# EAGLE board Shibobi_PowerMeasure (EAGLE 9.1.0)
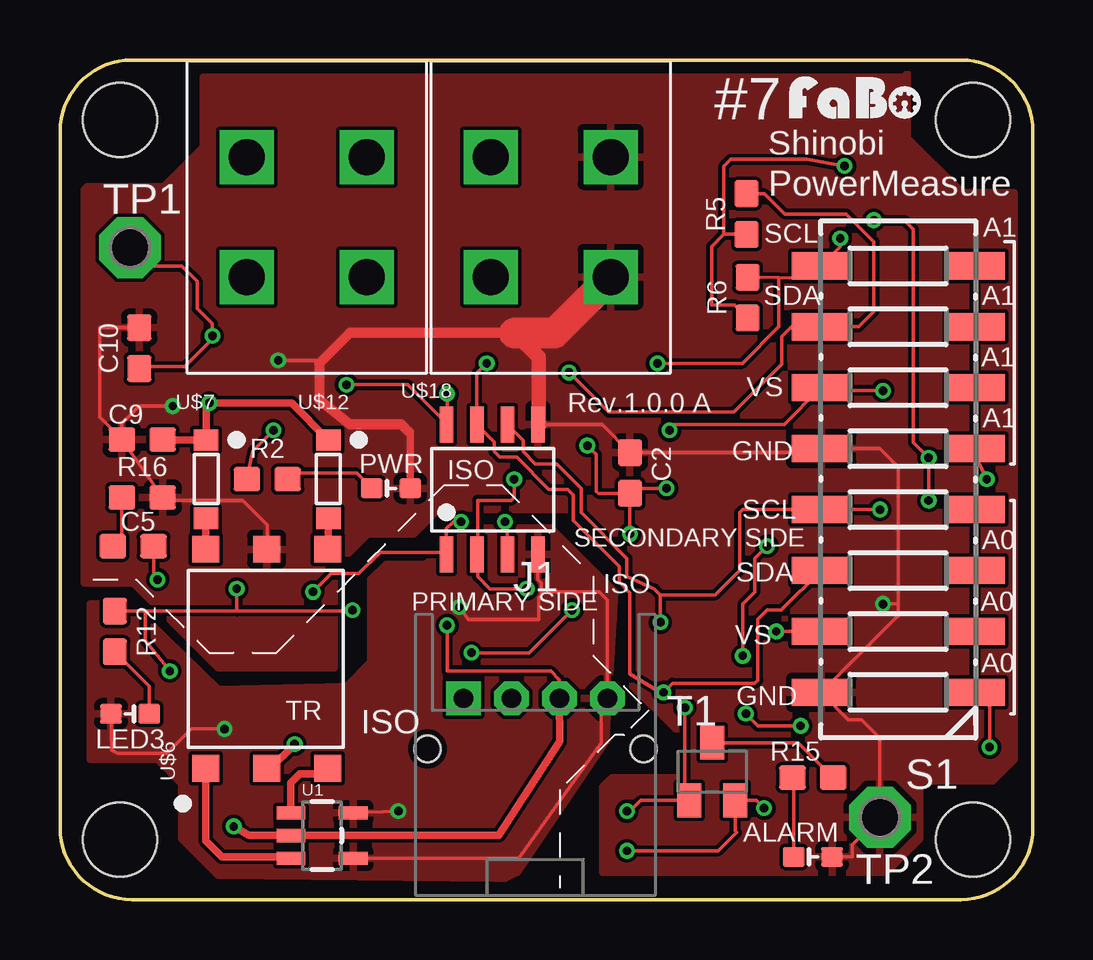
[diagram p0: board, top side]
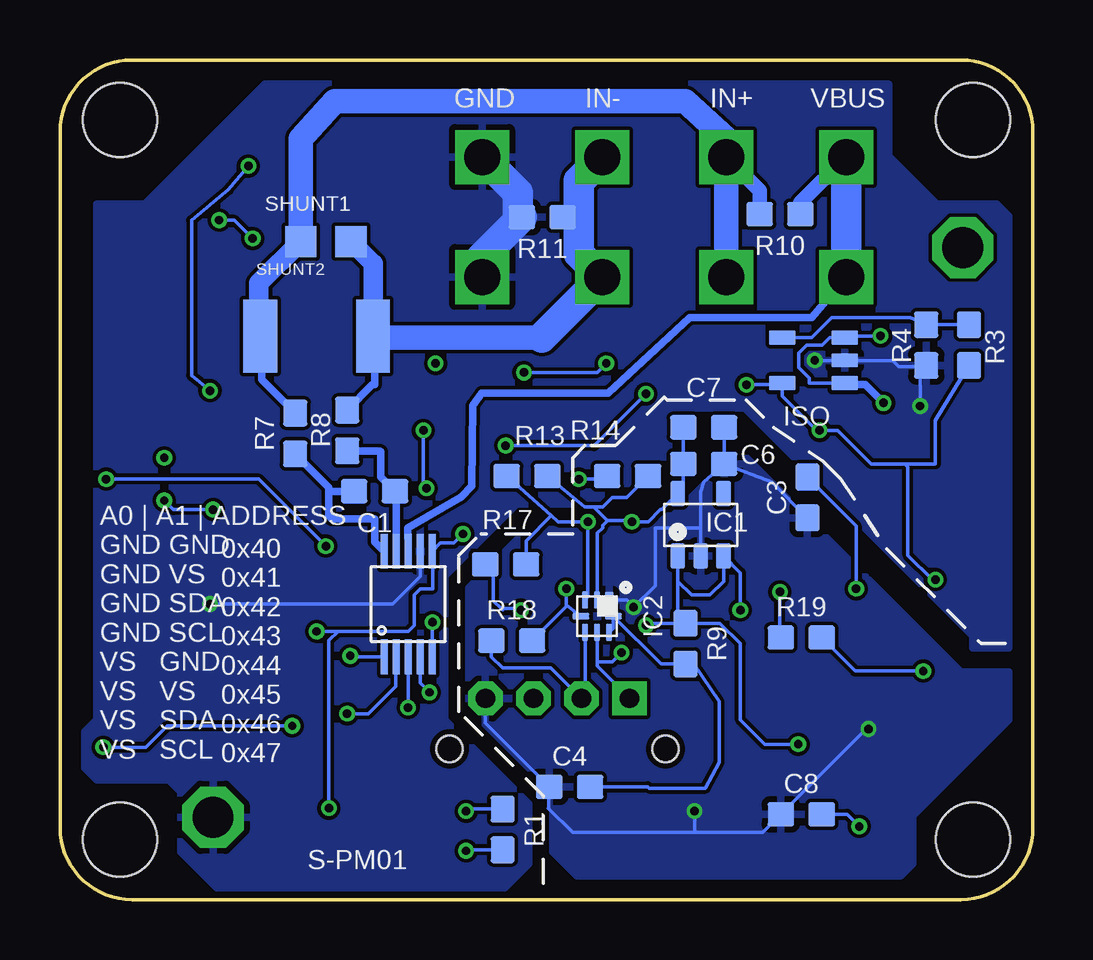
[diagram p1: board, bottom side, seen from below]

Size 40.54 x 35 mm. Coordinates in mm from the lower left corner, seen from the top.
Copper layers (1*16): Top 0.035mm / dielectric 1.5mm / Bottom 0.035mm
Design rules "SeeedStudio_2layer_DRU_no_angle_20140221": minimum track width 6mil, minimum drill 12mil, track to track 6mil, track to pad 6mil, pad to pad 6mil, via to via 6mil, smd to smd 0mil, copper to edge 10mil, drill to drill 10mil, minimum pad ring 10mil, minimum via ring 6mil, stop-mask expansion 2mil, vias tented up to drill 100mil, thermal gap 10mil

## Footprints (pad centres in the part's own frame; a part is rotated, then mirrored left to right if it is on the bottom)
0603 = smd 0.9 x 0.8: ANODE -0.8,0; CATHODE 0.8,0
0603' = smd 1.1 x 1: 1 -0.85,0; 2 0.85,0
SOT-23-5 = smd 0.6 x 1.05: 1 -0.95,-1.3; 2 0,-1.3; 3 0.95,-1.3; 4 0.95,1.3; 5 -0.95,1.3
XQFN8 = smd 0.7 x 0.35: 1 -0.675,0.5 | smd 0.7 x 0.25: 2 -0.675,0; 3 -0.675,-0.5; 5 0.675,-0.5; 6 0.675,0; 7 0.675,0.5 | smd 0.25 x 0.7: 4 0,-0.675; 8 0,0.675
FABO_BRICK_I2C_S04B-PASK-2 = drill 0.8 pad 1.422 octagon: GND -3,0; SDA 1,0; VCC -1,0 | drill 0.8 pad 1.422 square: SCL 3,0 | hole 1.1: 4.5,2.1; -4.5,2.1
CTS-219-08J = smd 1.13 x 2.44: 1 -8.89,-3.215; 2 -6.35,-3.215; 3 -3.81,-3.215; 4 -1.27,-3.215; 5 1.27,-3.215; 6 3.81,-3.215; 7 6.35,-3.215; 8 8.89,-3.215; 9 8.89,3.215; 10 6.35,3.215; 11 3.81,3.215; 12 1.27,3.215; 13 -1.27,3.215; 14 -3.81,3.215; 15 -6.35,3.215; 16 -8.89,3.215
PMR10EZPFV2L00 = smd 1.3 x 1.3: P$1 1.05,0; P$2 -1.05,0
WSL2010R0250FEB = smd 1.4 x 3.05: P$1 2.35,0; P$2 -2.35,0
SC59-BEC = smd 1 x 1.4: B -0.95,-1.2; C 0,1.2; E 0.95,-1.2
P1-17 = drill 1.702 pad 2.54 octagon: TP 0,0
SOT-23-5' = smd 1.2 x 0.55: 1 -1.3,0.95; 2 -1.3,0; 3 -1.3,-0.95; 4 1.3,-0.95; 5 1.3,0.95
TI-INA226 = smd 1.45 x 0.3: 1 -2.2,1; 2 -2.2,0.5; 3 -2.2,0; 4 -2.2,-0.5; 5 -2.2,-1; 6 2.2,-1; 7 2.2,-0.5; 8 2.2,0; 9 2.2,0.5; 10 2.2,1
ML-1400-S1 = drill 1.5 square: LEFT1 -2.5,2.5; LEFT2 -2.5,-2.5; RIGHT1 2.5,2.5; RIGHT2 2.5,-2.5
FABO-SHINOBI = hole 3.1: 2.5,32.5; 38.04,32.5; 38.04,2.5; 2.5,2.5
760390014 = smd 1.12 x 1.118: 1 -4.57,2.54; 2 -4.57,0; 3 -4.57,-2.54; 4 4.57,-2.54; 5 4.57,0; 6 4.57,2.54
MBR0502L = smd 1.02 x 0.88: P$1 0,0; P$2 0,-3.27
TPS76333 = smd 1.1 x 0.6: EN -1.3,-0.95; GND -1.3,0; IN -1.3,0.95; NC/FB 1.3,-0.95; OUT 1.3,0.95
ISO1541 = smd 0.55 x 1.5: GND1 1.905,-2.7; GND2 1.905,2.7; SCL1 0.635,-2.7; SCL2 0.635,2.7; SDA1 -0.635,-2.7; SDA2 -0.635,2.7; VCC1 -1.905,-2.7; VCC2 -1.905,2.7

## Placement (x,y rotation side)
ALARM  RED  [0603]  31.37,1.78 0 top
C1  0.1uF  [0603']  27.43,17.02 180 bottom
C2  0.1uF  [0603']  23.75,17.78 270 top
C3  0.1uF  [0603']  9.4,16.76 90 bottom
C4  0.1uF  [0603']  19.3,4.7 0 bottom
C5  10uF  [0603']  3.05,14.73 0 top
C6  1uF  [0603']  13.72,18.16 0 bottom
C7  NC  [0603']  13.72,19.68 0 bottom
C8  10uF  [0603']  9.65,3.56 0 bottom
C9  10uF  [0603']  3.43,19.18 180 top
C10  0.1uF  [0603']  3.3,22.99 90 top
IC1  3.3V  [SOT-23-5]  13.84,15.62 0 bottom
IC2  [XQFN8]  18.16,11.81 270 bottom
J1  [FABO_BRICK_I2C_S04B-PASK-2]  19.81,8.38 180 top
LED3  BLUE  [0603]  2.92,7.75 180 top
PWR  GREEN  [0603]  13.79,17.14 0 top
R1  4.7KΩ  [0603']  22.1,2.92 270 bottom
R2  1KΩ  [0603']  8.64,17.53 0 top
R3  300K  [0603']  2.67,23.11 270 bottom
R4  150K  [0603']  4.45,23.11 270 bottom
R5  4.7KΩ  [0603']  28.6,28.57 90 top
R6  4.7KΩ  [0603']  28.65,25.1 90 top
R7  10Ω  [0603']  30.73,19.43 90 bottom
R8  10Ω  [0603']  28.57,19.56 90 bottom
R9  200KΩ  [0603']  14.48,10.67 270 bottom
R10  0Ω  [0603']  10.54,28.57 180 bottom
R11  DNP  [0603']  20.45,28.45 180 bottom
R12  1KΩ  [0603']  2.29,11.18 270 top
R13  4.7KΩ  [0603']  21.08,17.65 0 bottom
R14  4.7KΩ  [0603']  16.89,17.65 0 bottom
R15  510Ω  [0603']  31.37,5.08 0 top
R16  1Ω  [0603']  3.43,16.76 0 top
R17  NC  [0603']  21.97,13.97 0 bottom
R18  NC  [0603']  21.72,10.79 0 bottom
R19  NC  [0603']  9.65,10.92 0 bottom
S1  219-08J  [CTS-219-08J]  34.92,17.53 90 top
SHUNT1  PMR10EZPFV2L00  [PMR10EZPFV2L00]  29.46,27.43 0 bottom
SHUNT2  WSL2010R0250FEB  [WSL2010R0250FEB]  29.84,23.5 0 bottom
T1  [SC59-BEC]  27.18,5.33 0 top
TP1  TPPAD1-17  [P1-17]  2.92,27.18 0 top
TP2  TPPAD1-17  [P1-17]  34.16,3.43 0 top
U1  SN6501DBVR  [SOT-23-5']  10.92,2.67 0 top
U2  TI-INA226  [TI-INA226]  26.04,12.32 90 bottom
U$2  ML-1400-S1  [ML-1400-S1]  10.29,28.45 0 top
U$3  ML-1400-S1  [ML-1400-S1]  20.45,28.45 0 top
U$5  [FABO-SHINOBI]  0,0 0 top
U$6  760390014  [760390014]  8.61,10.03 90 top
U$7  MBR0520L  [MBR0502L]  6.08,19.16 0 top
U$8  TPS76333  [TPS76333]  9.14,22.48 180 bottom
U$12  MBR0520L  [MBR0502L]  11.18,19.16 0 top
U$18  ISO1541  [ISO1541]  18.01,17.09 0 top
U$19  [LOGO_FABO_S]  33.19,32.41 0 top

## Library data of the parts
ALARM LED3 PWR = FaBo-LED
C1-C10 = FaBo-Capacitor
IC1 = FaBo-Supply
IC2 = FaBo-LevelTranslator
J1 U$5 = FaBo-Template
R1-R19 = FaBo-Resistors
S1 = switch-dil; OC_FARNELL: unknown; OC_NEWARK: unknown
SHUNT1 SHUNT2 U$6-U$8 U$12 U$18 = FaBo
T1 = transistor
TP1 TP2 = testpad
U1 = TI
U2 = FaBo-Sensor
U$2 = FaBo-Terminal; SPICEPREFIX: B
U$3 = FaBo-Terminal
U$19 = FaBo-Logo

## Nets
3.3V: C2.2 C5.2 R1.2 R2.1 R3.2 R5.1 R6.1 S1.11 S1.15 T1.E U2.6 U$8.OUT U$18.VCC2
A0: S1.1 S1.2 S1.3 S1.4 U2.2
A1: S1.5 S1.6 S1.7 S1.8 U2.1
GND: C3.1 C4.1 C6.2 C7.2 C8.1 IC1.2 IC2.1 J1.GND LED3.CATHODE U1.4 U1.5 U$18.GND1
GND_SECONDARY: ALARM.CATHODE C2.1 C9.2 C10.2 PWR.CATHODE R4.2 R11.2 R16.2 S1.12 S1.16 TP2.TP U2.7 U$3.RIGHT1 U$3.RIGHT2 U$6.5 U$8.GND U$18.GND2
N$1: C1.2 R7.1 U2.10
N$2: C1.1 R8.1 U2.9
N$3: U1.3 U$6.1
N$4: U1.1 U$6.3
N$5: R1.1 T1.B U2.3
N$6: U$6.6 U$7.P$2
N$7: ALARM.ANODE R15.1
N$8: PWR.ANODE R2.2
N$9: R15.2 T1.C
N$10: LED3.ANODE R12.2
N$11: IC2.4 R14.1 R18.2 U$18.SDA1
N$12: IC2.6 J1.SCL R17.1
N$13: C6.1 C7.1 IC1.5 IC2.2 R13.2 R14.2 R19.1 U$18.VCC1
N$14: U$6.4 U$12.P$2
N$16: C9.1 C10.1 TP1.TP U$7.P$1 U$8.EN U$8.IN U$12.P$1
N$18: C4.2 IC2.7 IC2.8 R9.2
N$19: C3.2 C8.2 IC1.1 IC1.3 J1.VCC R9.1 R12.1 R19.2 U1.2 U$6.2
N$20: R3.1 R4.1 U$8.NC/FB
N$21: C5.1 R16.1
N$22: IC2.5 J1.SDA R18.1
N$23: IC2.3 R13.1 R17.2 U$18.SCL1
SCL: R6.2 S1.9 S1.13 U2.5 U$18.SCL2
SDA: R5.2 S1.10 S1.14 U2.4 U$18.SDA2
VBUS: R10.1 U2.8 U$2.LEFT1 U$2.LEFT2
VIN+: R7.2 R10.2 SHUNT1.P$2 SHUNT2.P$2 U$2.RIGHT1 U$2.RIGHT2
VIN-: R8.2 R11.1 SHUNT1.P$1 SHUNT2.P$1 U$3.LEFT1 U$3.LEFT2

## Tracks (layer width: path | path; a pad name or v marks a point on that pad's centre or on a via)
3.3V  (via drill 0.35)
  Top 0.152: S1.15 v29.84,11.18 | v23.75,15.24 C2.2 | v23.62,2.03 27.43,2.03 28.19,2.79 28.13,2.86 T1.E 29.01,4.13 v29.34,3.81 | S1.11 31.67,21.29 | 31.67,21.29 30.19,19.81 25.53,19.81 25.4,19.68 v25.4,19.56 | v25.27,17.14 23.96,17.14 C2.2 | v21.97,18.92 22.35,18.54 22.35,17.02 22.44,16.93 C2.2 | v34.29,21.21 31.75,21.21 31.67,21.29 | v8.89,19.56 8.04,18.71 R2.1 | C5.2 3.9,13.37 3.94,13.34 v4.06,13.34 | v32.69,30.58 31.11,30.86 27.94,30.86 27.66,30.58 27.66,27.74 | R6.1 28.11,24.79 27.15,24.79 27.15,27.23 27.66,27.74 | 27.66,27.74 28.59,27.74 R5.1 | U$18.VCC2 16.13,19.82 | 16.13,19.82 v16.13,21.08 | 16.13,19.82 14.49,21.46 v11.94,21.46
  Bottom 0.152: v29.84,11.18 28.96,11.18 | 28.96,11.18 26.04,11.18 25.78,11.43 25.78,12.7 25.53,12.95 25.02,12.95 25.02,14.5 U2.6 24.7,14.86 24.13,14.86 v23.75,15.24 | R1.2 23.58,2.07 v23.62,2.03 | v29.34,3.81 29.34,10.79 28.96,11.18 | v11.94,21.46 10.51,21.46 U$8.OUT 10.44,20.98 9.02,19.56 v8.89,19.56 8.13,19.56 6.73,18.16 5.33,18.16 | v25.4,19.56 25.4,17.4 25.27,17.27 v25.27,17.14 | v16.13,21.08 18.29,18.92 v21.97,18.92 | v32.69,30.58 33.53,29.59 35.05,28.32 35.05,21.84 v34.29,21.21 | R3.2 4.06,19.98 4.06,18.16 5.33,18.16 | v4.06,13.34 4.19,13.34 5.21,14.35 5.21,18.03 5.33,18.16
A0  (via drill 0.35)
  Top 0.152: v28.57,7.75 29.08,7.24 v30.86,7.24 | v38.73,6.35 38.73,8.04 S1.1 S1.2 S1.3 S1.4
  Bottom 0.152: U2.2 26.54,8.89 27.69,7.75 v28.57,7.75 | v30.86,7.24 36.07,7.24 36.96,6.35 v38.73,6.35
A1  (via drill 0.35)
  Top 0.152: v38.62,17.53 38.14,18.5 S1.5 S1.6 S1.7 S1.8 | v29.46,14.73 28.96,14.22 28.96,12.83 28.45,12.32 v28.45,10.16
  Bottom 0.152: U2.1 28.41,10.12 v28.45,10.16 | v29.46,14.73 32.26,17.53 v38.62,17.53
GND  (via drill 0.35)
  Top 0.152: U1.4 19.12,1.72 22.54,6.54 22.54,8.24 J1.GND 22.81,12.49 22.48,12.83 20.05,12.83 | 20.05,12.83 20.05,12.7 19.94,12.59 19.94,11.68 17.02,11.68 v16.64,12.19 | 20.05,12.83 20.05,13.21 19.91,13.34 U$18.GND1 | 12.22,3.56 U1.5 v14.1,3.68 | v6.86,7.11 5.46,7.11 4.45,6.1 2.41,6.1 2.16,6.22 LED3.CATHODE
  Bottom 0.152: C4.1 20.17,4.72 | 20.17,4.72 22.81,7.36 J1.GND | C6.2 C7.2 | C6.2 10.88,17.4 C3.1 | IC2.1 16.93,12.49 v16.64,12.19 15.75,13.08 15.75,15.49 13.84,15.49 | 14.1,2.79 11.26,2.79 C8.1 6.95,7.11 v6.86,7.11 | 14.1,2.79 19.18,2.79 20.19,3.81 20.17,3.83 20.17,4.72 | v14.1,3.68 14.1,2.79 | IC1.2 13.84,15.49 | 13.84,15.49 13.84,17.02 13.72,17.4 C6.2
  pour Top: 1.27,12.32 2.92,12.32 6.6,8.76 11.94,8.89 12.95,9.91 12.95,13.34 13.59,13.97 15.24,13.97 16.64,15.37 16.76,15.37 16.89,15.49 20.45,15.49 23.11,12.83 22.73,6.6 19.05,1.14 18.54,0.89 18.16,0.89 6.6,1.02 5.08,2.54 5.08,4.83 4.06,5.84 1.27,5.84
  pour Bottom (isolate 0.04): 1,9.5 1,7.5 3.5,5 5,3.5 5,1.5 5.5,1 19,1 20,2 20,4.5 23.5,8 23.5,13 21,15.5 20.5,15.5 20,16 15,16 12.5,18.5 12.5,19 3,9.5
GND_SECONDARY  (via drill 0.35)
  Top 0.152: 31.37,18.63 C2.1 22.59,19.79 19.99,19.79 U$18.GND2 | 31.37,18.63 31.54,18.63 S1.12 | 34.92,12.32 34.92,11.81 34.88,11.81 S1.16 32.85,7.49 33.4,7.49 34.16,6.73 TP2.TP 33.02,2.29 33.02,1.78 ALARM.CATHODE | 34.92,12.32 34.92,18.03 34.16,18.8 31.54,18.8 31.37,18.63 | v34.29,12.32 34.92,12.32 | C10.2 1.65,23.84 1.65,20.11 C9.2 | C9.2 R16.2 4.41,16.64 7.62,16.64 8.64,15.62 8.64,14.63 U$6.5 | 14.35,19.68 14.22,19.81 | C9.2 2.58,19.85 3.3,20.57 v4.7,20.57 | 14.54,17.08 PWR.CATHODE | v9.09,22.48 10.67,22.48 10.79,22.35
  Top 0.305: PWR.CATHODE 14.59,19.44 14.54,19.5
  Top 0.406: 18.92,23.62 12.06,23.62 10.79,22.35 10.79,20.83 12.06,19.81 14.22,19.81 | 14.54,19.5 14.35,19.68
  Top 0.61: 18.92,23.62 19.94,22.61 19.94,19.84 19.99,19.79
  Top 1.27: U$3.RIGHT2 20.62,23.62 18.92,23.62
  Bottom 0.152: U2.7 25.54,13.47 25.53,13.46 26.67,12.32 v34.29,12.32 | v4.7,20.57 4.7,22.01 R4.2 4.48,22.23 5.59,22.23 5.84,22.48 U$8.GND v9.09,22.48
  Bottom 1.27: U$3.RIGHT1 21.46,29.46 21.46,28.61 R11.2 22.95,26.8 U$3.RIGHT2
  pour Top: 1.14,29.72 4.32,29.72 5.59,30.99 5.97,31.37 5.97,34.29 35.18,34.29 35.31,34.42 35.31,31.75 37.47,29.59 37.59,29.46 39.75,29.46 39.75,5.84 38.86,4.95 35.81,4.95 35.81,2.54 34.54,1.27 34.42,1.14 22.61,1.14 22.61,4.7 22.73,4.83 22.99,5.08 25.78,5.08 25.78,6.99 23.75,9.02 23.75,9.78 23.75,13.72 21.21,16.26 16,16.26 15.88,16.38 14.73,15.24 14.22,15.24 12.83,15.24 12.7,15.11 11.43,13.84 11.43,9.65 6.6,9.65 3.05,13.21 1.02,13.21 1.02,29.46 1.02,29.59
  pour Bottom: 1.5,29 4,29 6,31 6,34 32,34 34.5,31.5 37,29 39,29 39,7.5 39.5,7 39.5,5.5 39,5 36,5 35.5,4.5 35.5,2 34,0.5 32,0.5 22,0.5 21,1.5 21,4 22,5 24.5,7.5 24.5,9.5 24.5,13.5 24,14 21.5,16.5 20.5,16.5 17,16.5 15.5,18 15,18.5 15,20.5 12,20.5 2.5,11 2.5,10.5 1,10.5 1,28.5
N$1
  Bottom 0.305: U2.10 27.43,14.92 27.43,15.88 29.21,15.88 29.34,16 29.34,17.02 | 28.07,17.31 C1.2 29.34,17.02 | R7.1 29.34,17.18 29.34,17.02
N$2
  Bottom 0.305: U2.9 26.54,16.97 C1.1 27.18,17.61 27.18,18.67 27.22,18.71 R8.1
N$3
  Top 0.152: U1.3 9.56,1.78
  Top 0.305: 9.56,1.78 6.73,1.78 6.07,2.44 U$6.1
N$4
  Top 0.305: U$6.3 10.92,5.23 9.98,5.23 9.62,4.87 U1.1
N$5  (via drill 0.35)
  Top 0.152: v26.04,8 26.04,4.33 T1.B 24.2,4.13 23.75,3.68 v23.62,3.68
  Bottom 0.152: U2.3 v26.04,8 | R1.1 23.46,3.77 23.5,3.81 v23.62,3.68
N$6
  Top 0.305: U$6.6 6.07,15.88 U$7.P$2
N$7
  Top 0.152: ALARM.ANODE 30.57,5.03 R15.1
N$8
  Top 0.152: R2.2 9.99,17.78 12.36,17.78 PWR.ANODE
N$9
  Top 0.152: T1.C 30.77,6.53 R15.2
N$10
  Top 0.152: LED3.ANODE 3.72,8.89 R12.2
N$11  (via drill 0.35)
  Top 0.152: v19.44,12.95 17.91,12.95 17.4,13.46 17.4,14.37 U$18.SDA1 17.4,14.42 17.4,16.64 18.8,16.64 18.92,16.76 v18.92,17.53
  Bottom 0.152: IC2.4 19.44,12.29 | 19.44,12.29 v19.44,12.95 | R14.1 17.87,17.53 v18.92,17.53 | R18.2 19.44,12.22 19.44,12.29
N$12  (via drill 0.35)
  Top 0.152: v21.34,12.06 19.56,10.29 v17.14,10.29
  Bottom 0.152: IC2.6 18.16,9.91 | 18.16,9.91 18.16,9.73 J1.SCL | R17.1 22.48,13.63 22.48,12.45 22.16,12.13 | 22.16,12.13 22.1,12.06 | 22.16,12.13 21.4,12.13 v21.34,12.06 | v17.14,10.29 17.53,9.91 18.16,9.91
N$13  (via drill 0.35)
  Top 0.152: v10.54,12.83 11.3,13.59 12.45,13.59 13.34,14.48 16.02,14.48 U$18.VCC1 16.1,15.47 16.38,15.75 v16.71,15.75
  Bottom 0.152: IC2.2 18.16,15.27 17.93,15.5 17.93,15.59 17.72,15.81 | R13.2 18.68,16.36 18.29,16.36 | 17.72,15.81 17.75,15.81 18.29,16.36 | 18.29,16.36 17.93,16.36 17.53,16.76 16.93,16.76 R14.2 | 14.79,16.48 IC1.5 | IC1.5 14.57,17.15 C6.1 C7.1 | R19.1 10.54,10.96 v10.54,12.83 | 17.72,15.81 16.78,15.81 v16.71,15.75 16.03,15.75 15.52,16.26 15.46,16.26 IC1.5
N$14
  Top 0.305: U$6.4 11.18,14.63 U$12.P$2
  Top 0.406: U$12.P$2
N$16  (via drill 0.35)
  Top 0.152: C10.1 3.39,22.23 5.21,22.23 6.35,23.37 v6.35,23.5 6.35,24 5.71,24.64 5.71,25.78 5.08,26.42 3.68,26.42 TP1.TP
  Top 0.305: v6.22,20.7 9.65,20.7 9.65,20.69 U$12.P$1 | 6.1,20.57 v6.22,20.7 | v6.22,20.7 6.08,20.56 U$7.P$1 4.29,19.16 C9.1
  Bottom 0.152: 7.91,21.46 U$8.IN arc-90 7.85,21.54 9.32,21.54 9.32,21.74 9.75,22.17 9.75,22.78 9.42,23.11 8.79,23.11 8.47,23.43 U$8.EN 7.78,23.5 v6.35,23.5
  Bottom 0.305: U$8.IN 7.78,21.46 6.99,21.46 v6.22,20.7
N$18
  Bottom 0.152: IC2.7 17.49,11.31 IC2.8 15.49,9.82 R9.2 14.14,9.82 13.08,8.26 13.08,5.71 13.65,4.64 15.99,4.64 16.05,4.7 C4.2
N$19  (via drill 0.35)
  Top 0.152: 9.65,6.48 v9.78,6.48 | v16.13,11.43 16.13,9.53 20.45,9.53 20.81,9.16 J1.VCC | 7.37,12.03 3.56,12.03 | 3.56,12.03 R12.1 | v7.37,12.95 7.37,12.03 | v4.57,9.53 3.56,10.79 3.56,12.03 | v12.19,12.06 12.15,12.03 7.37,12.03
  Top 0.305: J1.VCC 20.83,6.6 18.29,2.67 U1.2 7.87,2.67 v7.24,3.05 | v9.78,6.48 8.77,5.46 U$6.2
  Bottom 0.152: R9.1 14.79,11.83 IC1.1 14.79,13.27 14.22,12.7 13.46,12.7 12.89,13.27 IC1.3 12.19,13.62 v12.19,12.06 | v9.78,6.48 11.18,6.48 12.19,7.49 12.19,10.67 13.04,11.52 R9.1 | v16.13,11.43 16.04,11.52 R9.1 | C3.2 7.37,15.58 v7.37,12.95 | C8.2 7.75,3.56 v7.24,3.05 | R19.2 7.41,9.53 v4.57,9.53
N$20
  Bottom 0.152: U$8.NC/FB 9.21,23.43 8.38,24.26 5.12,24.26 R4.1 R3.1
N$21
  Top 0.152: R16.1 2.58,15.11 C5.1
N$22
  Bottom 0.152: IC2.5 18.66,8.53 J1.SDA 20.08,9.65 22.1,9.65 22.57,10.12 R18.1
N$23  (via drill 0.35)
  Top 0.152: 18.67,15.62 v18.54,15.75 18.64,15.65 U$18.SCL1
  Bottom 0.152: IC2.3 18.54,12.61 v18.54,15.75 19.77,15.75 20.06,16 | R13.1 20.06,16 | R17.2 21.12,14.95 20.06,16
SCL  (via drill 0.35)
  Top 0.152: 25.02,12.7 24.77,12.95 23.62,13.46 23.62,14.22 21.72,16.13 21.72,17.14 20.7,18.16 19.81,18.16 19.3,18.67 19.3,19.13 U$18.SCL2 | 25.02,12.7 v25.02,11.56 | 25.02,12.7 27.3,12.7 28.32,13.72 28.32,16.13 28.45,16.26 S1.13 v34.16,16.26 | R6.2 29.95,25.93 | 29.95,25.93 31.2,25.91 S1.9 32.51,27.22 v32.51,27.56 | v33.91,28.32 35.18,28.32 35.56,27.94 35.56,19.05 v36.2,18.41 v36.2,16.64 | 29.95,25.93 29.95,23.88 28.42,22.35 v24.89,22.35
  Bottom 0.152: v25.02,11.56 25.04,11.54 U2.5 | v34.16,16.26 35.81,16.26 v36.2,16.64 | v32.51,27.56 33.27,28.32 v33.91,28.32
SDA  (via drill 0.35)
  Top 0.152: S1.14 30.06,12.06 29.46,12.06 29.08,11.68 29.08,9.14 28.96,9.02 25.53,9.02 v25.15,8.64 25.02,8.64 23.75,9.4 23.75,12.78 23.29,13.23 23.29,13.89 21.39,15.8 21.39,16.87 21.16,17.09 20.37,17.09 19.02,18.44 18.31,18.44 18.09,18.67 18.09,19.08 U$18.SDA2 17.37,21.95 v17.78,22.35 | S1.10 30.73,23.88 | S1.10 33.27,23.88 33.91,24.51 33.91,27.43 32.77,28.57 30.2,28.57 29.35,29.43 R5.2 | v21.21,21.97 22.86,20.32 28.07,20.32 30.07,22.33 30.07,23.47 30.48,23.88 S1.10
  Bottom 0.152: U2.4 25.54,9.03 v25.15,8.64 | v21.21,21.97 18.16,21.97 v17.78,22.35
VBUS
  Bottom 0.305: U2.8 26.04,15.49 23.81,16.78 23.39,17.24 23.34,20.6 22.96,21.11 17.7,21.11 14.3,24.26 9.22,24.26 U$2.LEFT2
  Bottom 0.61: R10.1 9.69,29.04 U$2.LEFT1
  Bottom 1.27: U$2.LEFT2 U$2.LEFT1
VIN+
  Bottom 0.305: R7.2 32.13,21.68 32.13,23.43 SHUNT2.P$2 32.26,23.56 | 30.48,27.47 SHUNT1.P$2
  Bottom 0.61: R10.2 11.39,29.55 U$2.RIGHT1
  Bottom 0.813: SHUNT1.P$2 32.26,25.69 32.26,23.56
  Bottom 1.016: U$2.RIGHT2 U$2.RIGHT1 12.79,31.71 14.48,33.27 29.08,33.27 30.51,31.72 SHUNT1.P$2
VIN-
  Bottom 0.152: R11.1 17.95,30.1 U$3.LEFT1
  Bottom 0.305: R8.2 27.52,21.46 27.43,21.46 27.43,23.43 SHUNT2.P$1
  Bottom 0.813: SHUNT2.P$1 27.5,26.51 SHUNT1.P$1
  Bottom 1.016: 27.43,23.43 20.46,23.43
  Bottom 1.27: 20.46,23.43 U$3.LEFT2 18.92,26.92 18.92,29.97 U$3.LEFT1

## Text on the board
tPlace: #7 | Shinobi | PowerMeasure | A1 | SCL | SDA | A1 | A1 | VS | Rev.1.0.0 A | A1 | ISO | GND | SCL | SECONDARY SIDE | A0 | ISO | SDA | PRIMARY SIDE | A0 | VS | A0 | GND | TR | ISO
bPlace: VBUS | IN+ | IN- | GND | ISO | 0x40 / 0x41 / 0x42 / 0x43 / 0x44 / 0x45 / 0x46 / 0x47 | A0 | A1 | ADDRESS / GND GND / GND VS / GND SDA / GND SCL / VS GND / VS VS / VS SDA / VS SCL | S-PM01